# Altium PCB ArduinoUnoShield.PcbDoc
Units mm, origin at the board's own origin, x right, y up, seen from the top; angles counter-clockwise.
Board outline 82.58 x 53.34 mm, 2 copper layers (Top Layer, Bottom Layer); 54 components, 54 nets, 203 pads, 29 vias.
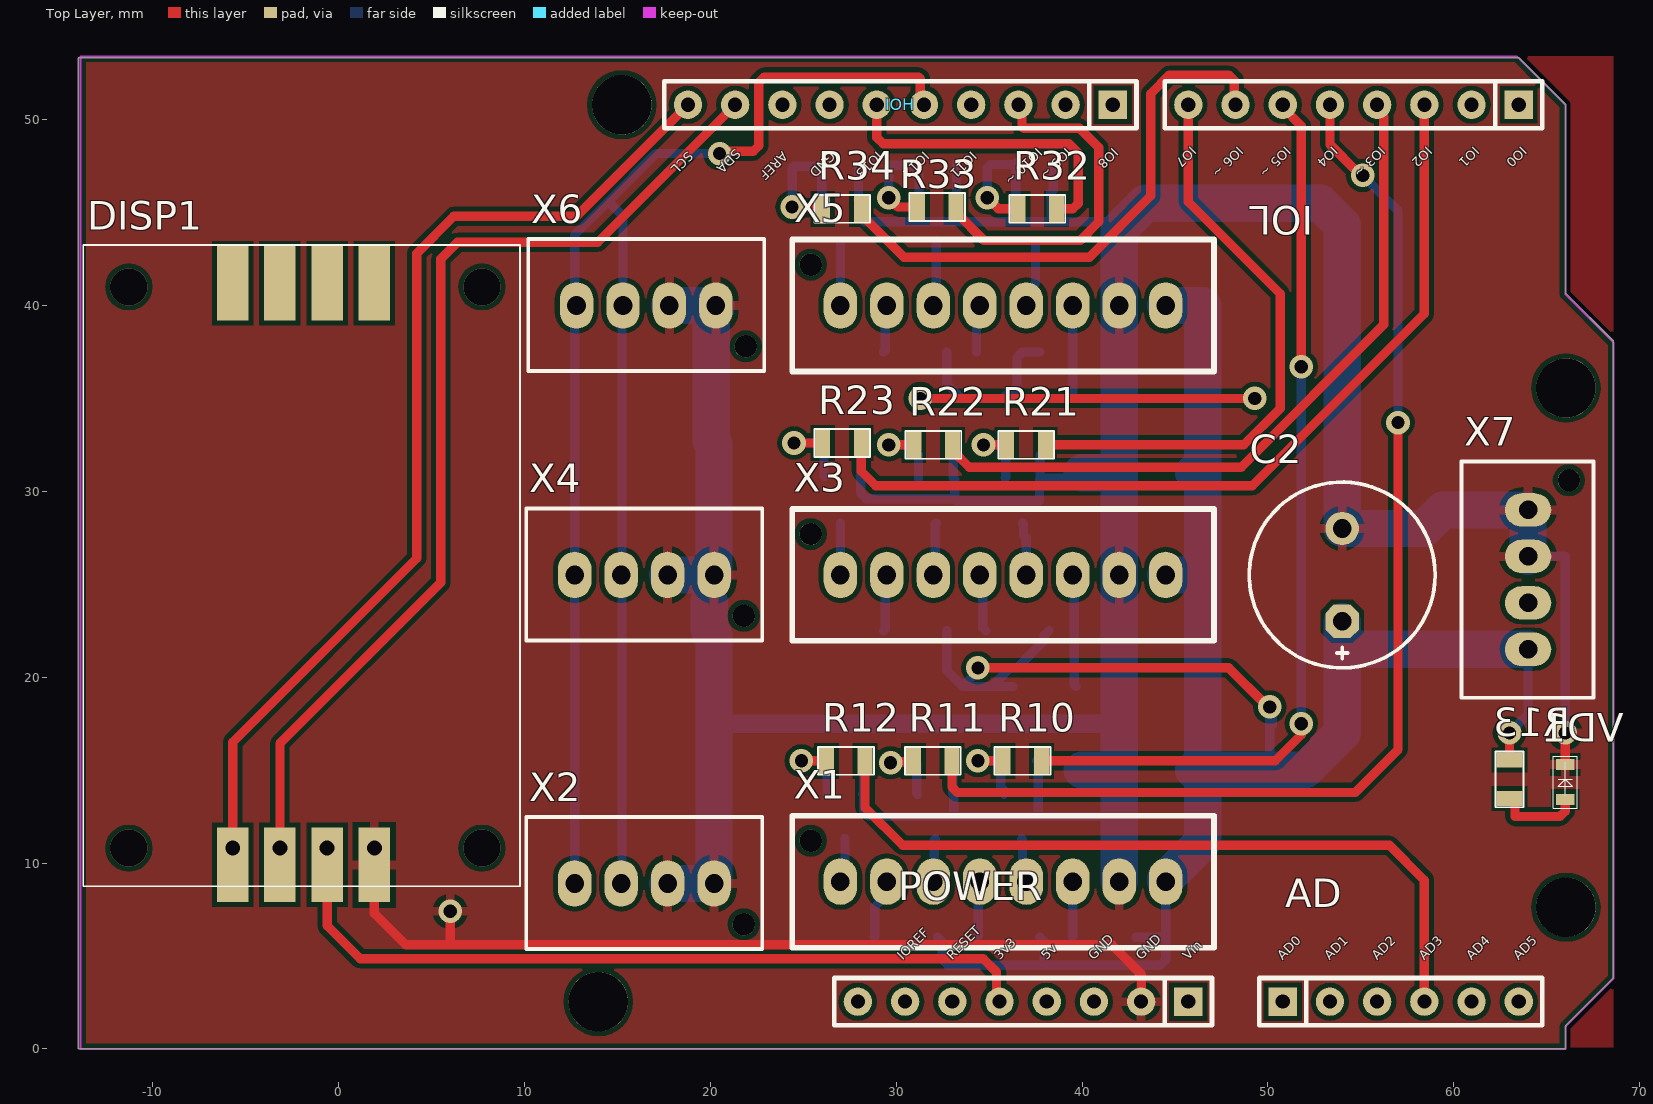
[diagram p0: Top Layer view]
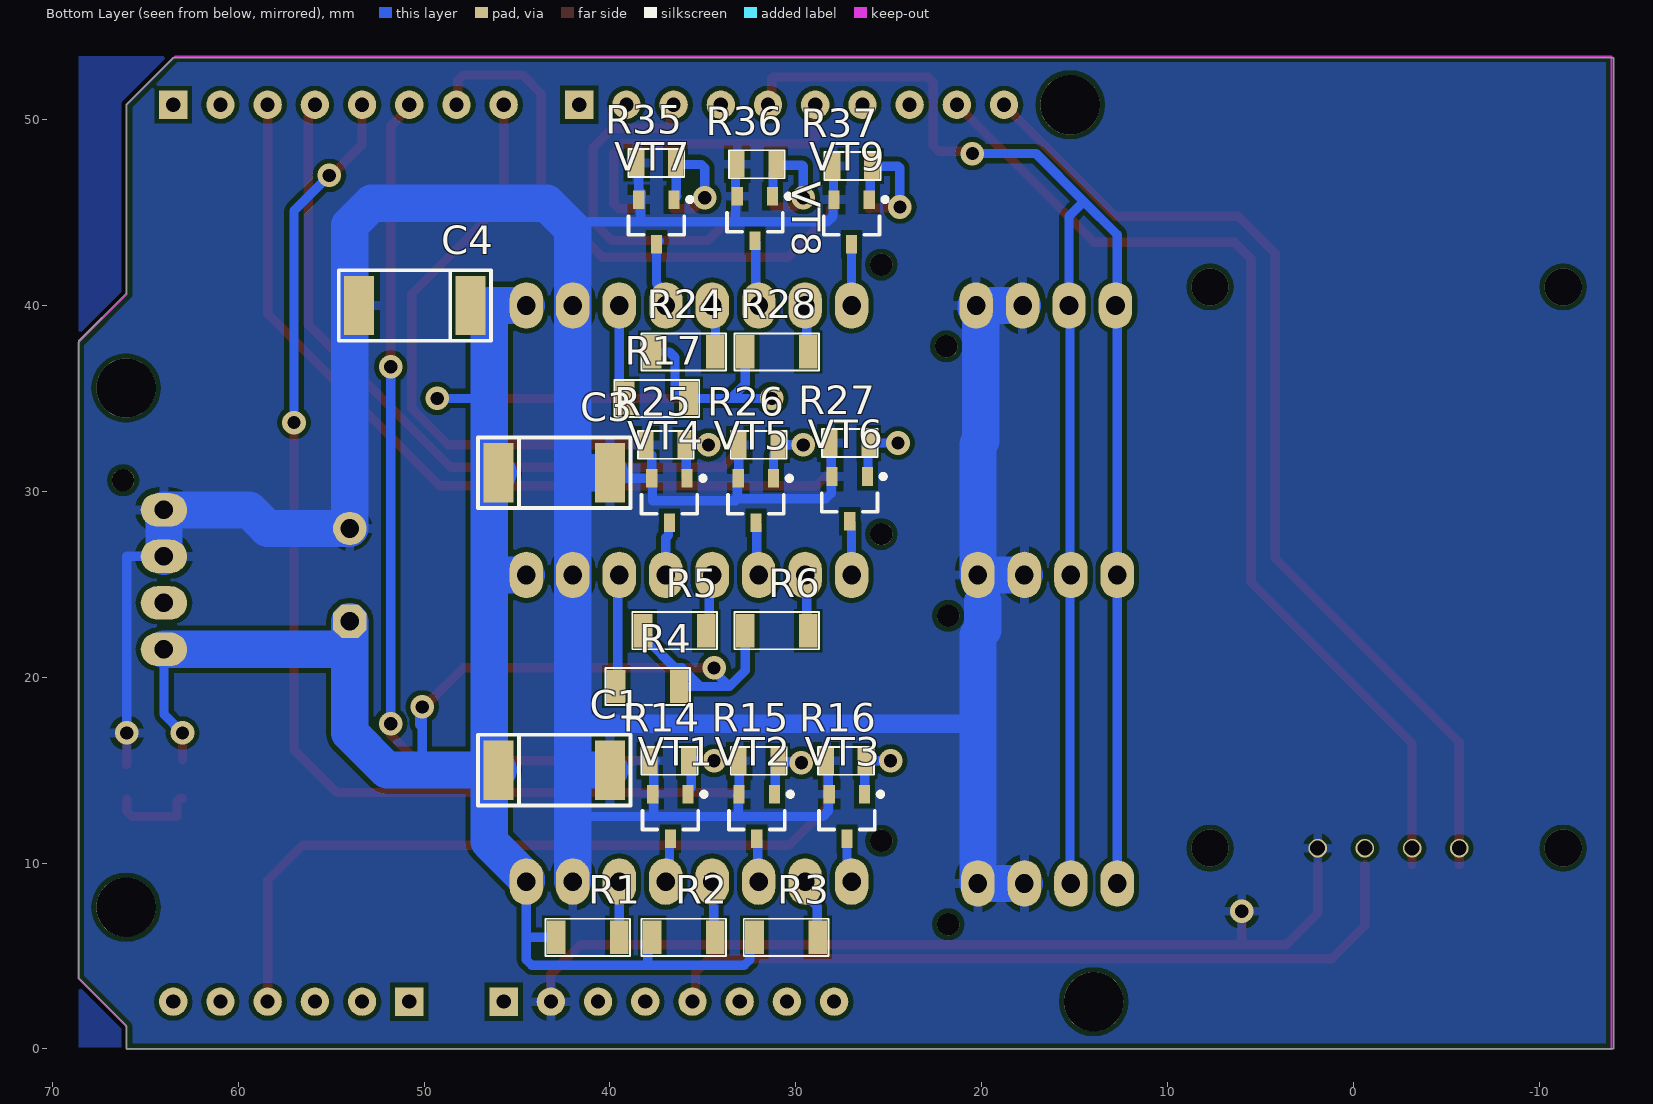
[diagram p1: Bottom Layer view, seen from below]
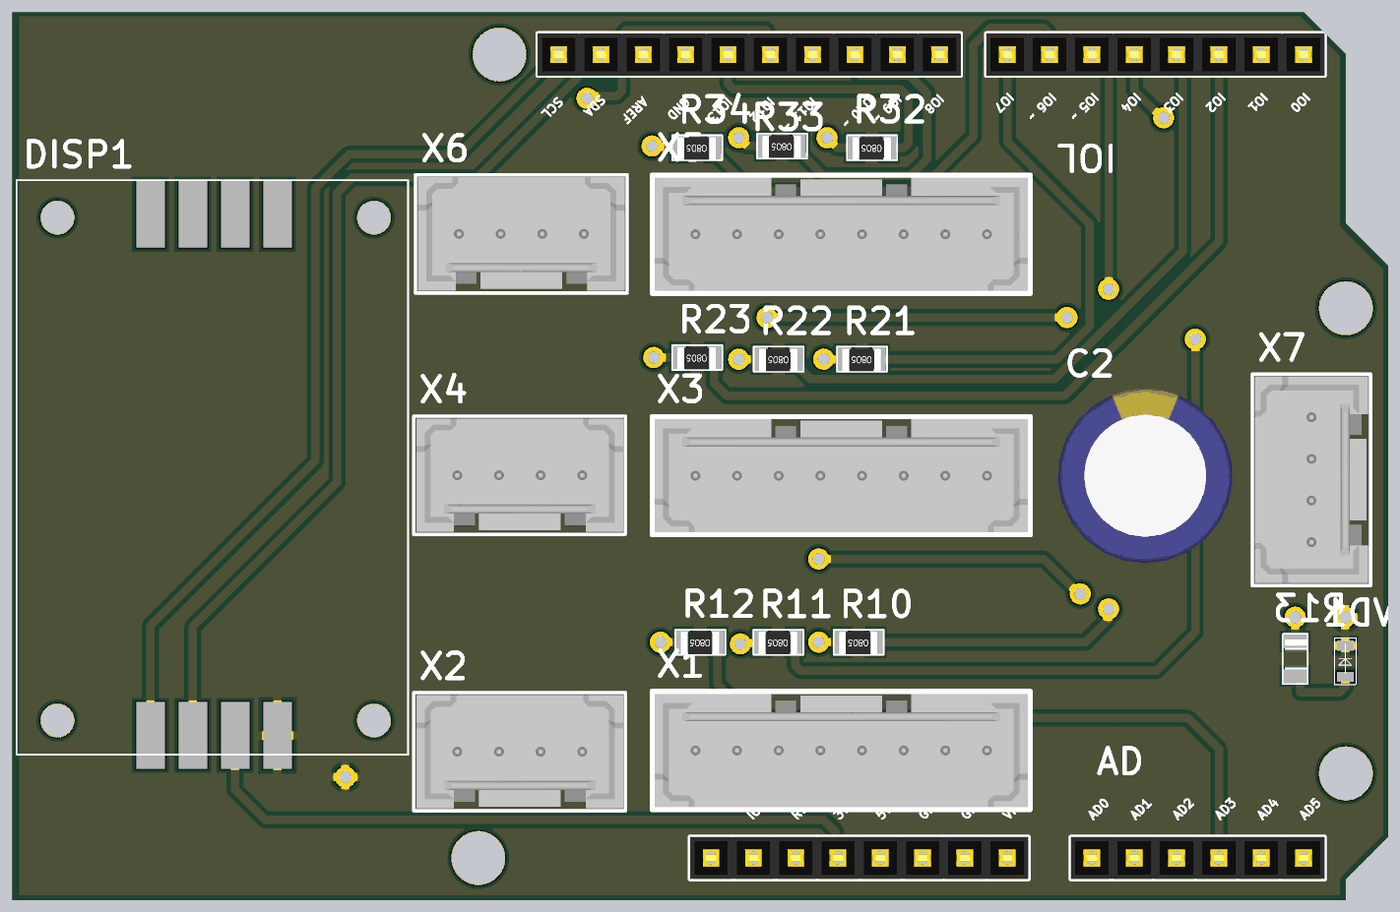
[diagram p2: 3D render of the assembled board from above, using the file's embedded part models]
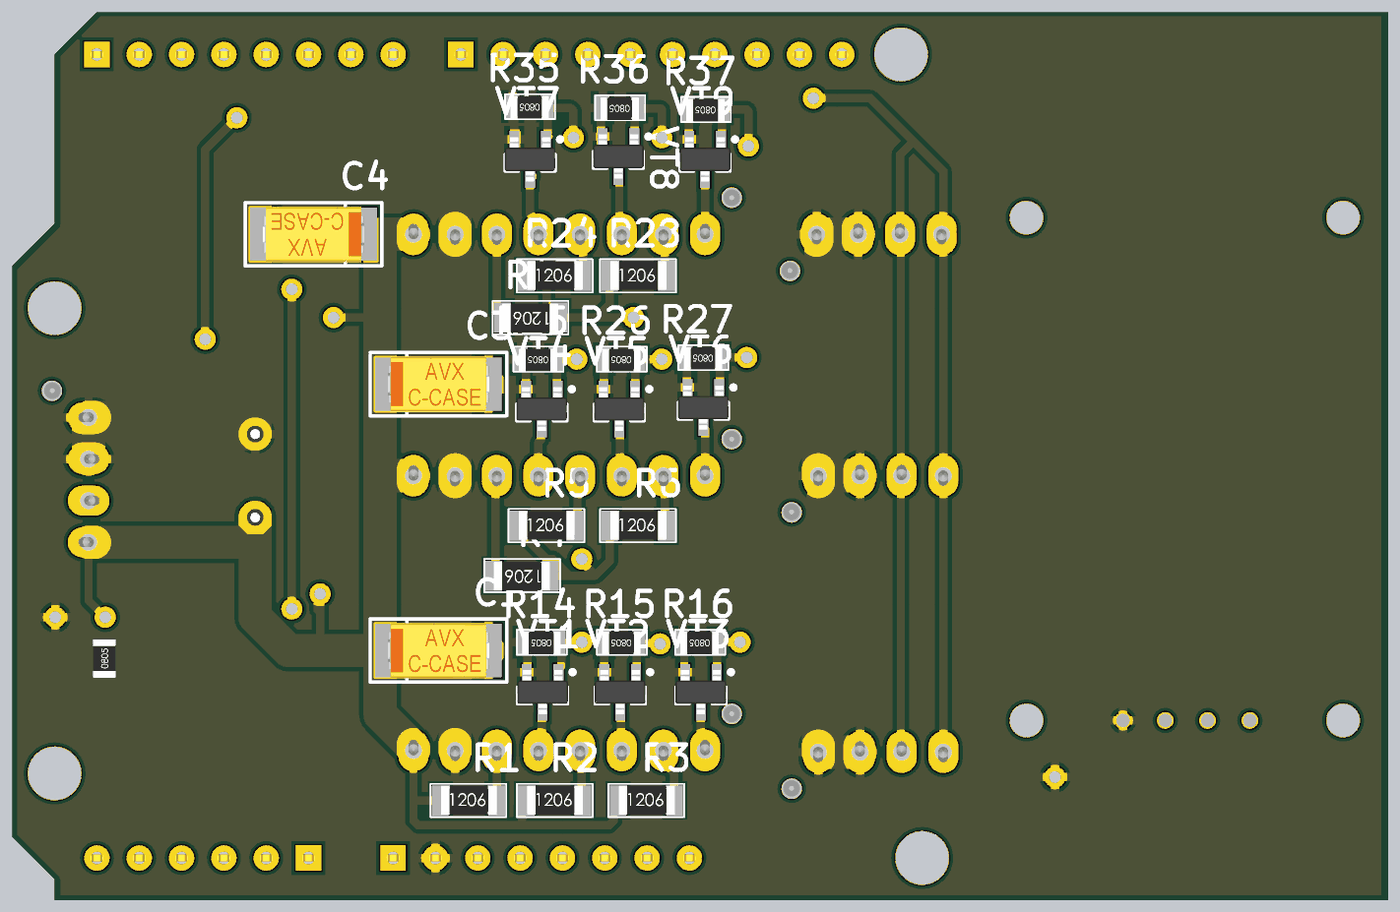
[diagram p3: 3D render of the assembled board from below, using the file's embedded part models]

## Layer stack, top to bottom
Top Solder: solder mask 0.0102, Solder Resist, Dk 3.5
Top Layer: signal copper 0.0356
Dielectric1: dielectric 0.32, FR-4, Dk 4.8
Bottom Layer: signal copper 0.0356
Bottom Solder: solder mask 0.0102, Solder Resist, Dk 3.5

## Board outline
-14,0 -14,53.34 63.5,53.34 66.04,50.8 66.04,40.64 68.58,38.1 68.58,3.81 66.04,1.27 66.04,0

## Design rules (kind name [scope] priority, off if disabled: settings)
Clearance [All] p1: gap=0.254 ignorepadtopadclearanceinfootprint=FALSE except(0: Arc-Hole Track-Hole SMDPad-Hole THPad-Hole Via-Hole Fill-Hole Poly-Hole Region-Hole Text-Hole)
PolygonConnect [All] p1: connectstyle=Relief reliefconductorwidth=0.5 reliefentries=4 polygonreliefangle="90 Angle" airgapwidth=0.3
RoomDefinition ArduinoUnoShield [InComponentClass('ArduinoUnoShield')] p1: confinementstyle=ConfineOut formatcopy=TRUE lockcomponents=FALSE outline 69.723,-0.889 84.709,-0.889 84.709,10.922 69.723,10.922
RoutingVias [All] p1: holewidth=0.711 width=1.27 viastyle="Through Hole" minholewidth=0.711 minwidth=1.27 maxholewidth=0.711 maxwidth=1.27
SilkToSolderMaskClearance SilkscreenOverComponentPads [IsPad] p1: minsilkscreentomaskgap=0.254 clearancetoexposedcopper=TRUE
SolderMaskExpansion [All] p1: expansion=0.102
Width [All] p1: maxlimit=2 minlimit=0.254 preferedwidth=0.5 minimp=50.000000 maximp=50.000000 favimp=50.000000
29 further rules are at their usual default settings.

## Components (designator, comment, footprint, x,y, rotation, side; value= is the part's Value field where it differs from the comment)
AD "AD" "Header 6x1 8.5mm" 50.8,2.54 r0 top locked
C1 "*" TANTAL_C 43,15 r180 bottom
C2 "*" D10C5H12.5 54,25.5 r90 top
C3 "*" TANTAL_C 43,31 r180 bottom
C4 "*" TANTAL_C 50.5,40 r0 bottom
DISP1 "OLED" "DISP: OPEN_SMART_0.96inch_OLED" -1.89,9 r90 top
IOH "IOH" "Header 10x1 8.5mm" 41.656,50.8 r180 top locked
IOL "IOL" "Header 8x1 8.5mm" 63.5,50.8 r180 top locked
POWER "POWER_UNO" "Header 8x1 8.5mm" 45.72,2.54 r180 top locked
R1 "R_1206_0.25v" R_1206 41.175,6 r180 bottom
R2 "R_1206_0.25v" R_1206 36,6 r180 bottom
R3 "R_1206_0.25v" R_1206 30.5,6 r180 bottom
R4 "R_1206_0.25v" R_1206 38,19.5 r0 bottom
R5 "R_1206_0.25v" R_1206 36.5,22.5 r180 bottom
R6 "R_1206_0.25v" R_1206 31,22.5 r180 bottom
R10 "R_0805_0.125v" R_0805 36.8,15.5 r180 top
R11 "R_0805_0.125v" R_0805 31.975,15.5 r180 top
R12 "R_0805_0.125v" R_0805 27.3,15.5 r180 top
R13 "R_0805_0.125v" R_0805 63,14.5 r90 top
R14 "R_0805_0.125v" R_0805 36.8,15.5 r0 bottom
R15 "R_0805_0.125v" R_0805 32,15.5 r0 bottom
R16 "R_0805_0.125v" R_0805 27.3,15.5 r0 bottom
R17 "R_1206_0.25v" R_1206 37.5,35 r0 bottom
R21 "R_0805_0.125v" R_0805 37,32.5 r180 top
R22 "R_0805_0.125v" R_0805 32,32.5 r180 top
R23 "R_0805_0.125v" R_0805 27.1,32.6 r180 top
R24 "R_1206_0.25v" R_1206 36,37.5 r180 bottom
R25 "R_0805_0.125v" R_0805 37,32.5 r0 bottom
R26 "R_0805_0.125v" R_0805 32,32.5 r0 bottom
R27 "R_0805_0.125v" R_0805 27.1,32.6 r0 bottom
R28 "R_1206_0.25v" R_1206 31,37.5 r180 bottom
R32 "R_0805_0.125v" R_0805 37.6,45.2 r180 top
R33 "R_0805_0.125v" R_0805 32.2,45.3 r180 top
R34 "R_0805_0.125v" R_0805 27.1,45.2 r180 top
R35 "R_0805_0.125v" R_0805 37.5,47.673 r0 bottom
R36 "R_0805_0.125v" R_0805 32.1,47.6 r0 bottom
R37 "R_0805_0.125v" R_0805 26.95,47.5 r0 bottom
VD1 "LED" VD_0603 66,14.5 r90 top
VT1 "*" SOT23_123 36.75,12.5 r270 bottom
VT2 "*" SOT23_123 32.1,12.5 r270 bottom
VT3 "*" SOT23_123 27.25,12.5 r270 bottom
VT4 "*" SOT23_123 36.8,29.5 r270 bottom
VT5 "*" SOT23_123 32.15,29.5 r270 bottom
VT6 "*" SOT23_123 27.1,29.6 r270 bottom
VT7 "*" SOT23_123 37.5,44.5 r270 bottom
VT8 "*" SOT23_123 32.2,44.673 r270 bottom
VT9 "*" SOT23_123 27,44.5 r270 bottom
X1 "*" "CON: 0533750810" 49.5,9 r180 top
X2 "*" "CON: 0533750410" 12.7,8.9 r0 top
X3 "*" "CON: 0533750810" 49.5,25.5 r180 top
X4 "*" "CON: 0533750410" 12.7,25.5 r0 top
X5 "*" "CON: 0533750810" 49.5,40 r180 top
X6 "*" "CON: 0533750410" 12.8,40 r0 top
X7 "*" "CON: 0533750410" 64,21.5 r90 top

## Footprints (in the part's own frame and the unit in brackets; to place one, negate y for a bottom-side part, rotate by r counter-clockwise, add the part's x,y. Pads: shape width x height; smd on the part's side, far side on the other; paste and mask are expansions set on the pad)
"CON: 0533750410" [mm] "MOLEX Mini-Lock"
  oval 1.8x2.5 hole 1: 1(0,0) 2(2.5,0) 3(5,0) 4(7.5,0)
  round 0.5 on Mech1: ""(-1.9,-2.8)
  round 1.2 hole 1.2: ""(9.1,-2.2)
  silkscreen extent -2.6,-3.52 10.1,3.57, body extent -2.44,-3.37 9.96,3.43, height 11.55
"CON: 0533750810" [mm] "MOLEX Mini-Lock"
  oval 1.8x2.5 hole 1: 1(5,0) 2(7.5,0) 3(10,0) 4(12.5,0) 5(15,0) 6(17.5,0) 7(20,0) 8(22.5,0)
  round 0.5 on Mech1: ""(3.2,-2.8)
  round 1.2 hole 1.2: ""(24.1,-2.2)
  silkscreen extent 2.4,-3.55 25.1,3.55, body extent 2.55,-3.4 24.95,3.4, height 11.55
D10C5H12.5 [mm] "Polar capacitor, diameter 10 mm, leads clearance 5 mm, height 12.5 mm"
  oct 1.8x1.8 hole 1: 1(-2.5,0)
  round 1.8 hole 1: 2(2.5,0)
  silkscreen extent -5,-5 5,5, body extent -5.25,-5.25 5.25,5.25, height 14
"DISP: OPEN_SMART_0.96inch_OLED" [mm]
  rect 4x1.7 smd: 0(32.2,-3.81) 0(32.2,-1.27) 0(32.2,1.27) 0(32.2,3.81) 1(0.9,3.81) 2(0.9,1.27) 3(0.9,-1.27) 4(0.9,-3.81)
  silkscreen extent -0.25,-11.65 34.25,11.85
"Header 6x1 8.5mm" [mil] "Stackable 6 pin header"
  rect 60x60 hole 30: 1(0,0)
  round 60 hole 30: 2(100,0) 3(200,0) 4(300,0) 5(400,0) 6(500,0)
  silkscreen extent -50,-50 550,50, body extent -50,-50 550,50, height 335
"Header 8x1 8.5mm" [mil] "Stackable 8 pin header"
  rect 60x60 hole 30: 1(0,0)
  round 60 hole 30: 2(100,0) 3(200,0) 4(300,0) 5(400,0) 6(500,0) 7(600,0) 8(700,0)
  silkscreen extent -50,-50 750,50, body extent -50,-50 750,50, height 335
"Header 10x1 8.5mm" [mil] "Stackable 10 pin header"
  rect 60x60 hole 30: 1(0,0)
  round 60 hole 30: 2(100,0) 3(200,0) 4(300,0) 5(400,0) 6(500,0) 7(600,0) 8(700,0) 9(800,0) 10(900,0)
  silkscreen extent -50,-50 950,50, body extent -50,-50 950,50, height 335
R_0805 [mm]
  rect 0.8x1.4 smd: 1(-1.025,0) 2(1.05,0)
  silkscreen extent -1.5,-0.75 1.5,0.75, body extent -1.12,-0.62 1.18,0.73, height 0.76
R_1206 [mm]
  rect 1x1.8 smd: 1(-1.725,0) 2(1.675,0)
  silkscreen extent -2.3,-1 2.25,1, body extent -1.67,-0.84 1.68,0.89, height 0.85
SOT23_123 [mm] "SOT23, 3-Leads, Body 3,0x2,6mm (max), Pitch 0,95mm, IPC Medium Density"
  rect 1x0.6 smd: 1(-1.2,0.95) 2(1.2,0) 3(-1.2,-0.95)
  round 0.5 on Mech1: ""(-0.9,1.1)
  silkscreen extent -1.32,-1.5 0.7,1.92, body extent -1.32,-1.52 1.32,1.52, height 1.12
TANTAL_C [mm]
  rect 1.6x3.2 smd: 1(-3,0) 2(3,0)
  round 0.5 on Mech1: ""(-2.5,1.1)
  silkscreen extent -4.1,-1.9 4.1,1.9, body extent -3.05,-1.67 3.05,1.68, height 2.7
VD_0603 [mm]
  rect 0.6x1 smd: 1(-1.075,0) 2(0.8,0)
  silkscreen extent -1.55,-0.65 1.25,0.65

## Part data
AD: Supplier Part Number 1=2699089, Supplier 1=Arrow, Supplier 2=Digi-Key, Supplier 3=Arrow, Supplier 4=Arrow, Supplier Part Number 2=SAM1198-06-ND, Supplier Part Number 3=2699088, Supplier Part Number 4=2699075
C1 C3 C4: library part TantalCap
C2: library part AlumCap
DISP1: library part OLED_SSD13
IOH: Supplier Part Number 1=2698803S4475693N1004, Supplier 1=Arrow, Supplier 2=Digi-Key, Supplier 3=Arrow, Supplier Part Number 2=SAM1198-10-ND, Supplier Part Number 3=2698789
IOL POWER: Supplier Part Number 1=SAM1198-08-ND, Supplier 1=Digi-Key, Supplier 2=Arrow, Supplier 3=Arrow, Supplier 4=Arrow, Supplier Part Number 2=2698939, Supplier Part Number 3=2698940, Supplier Part Number 4=2698925
VT1 VT2 VT3 VT4 VT5 VT6 VT7 VT8 VT9: library part N-chanel, "Mosfet"
X1 X3 X5: library part 8-Connector
X2 X4 X6 X7: library part 4-Connector

## Free pads (board coordinates)
  round 3.2 hole 3.2: 0(13.97,2.54) 0(15.24,50.8) 0(66.04,7.62) 0(66.04,35.56)

## Via types
v1: diameter 1.27, hole 0.711, Top Layer to Bottom Layer, 21 vias
v2: diameter 2, hole 2, Top Layer to Bottom Layer, 4 vias
v3: diameter 1, hole 0.8, Top Layer to Bottom Layer, 4 vias

## Nets (pads, with @x,y where several pads share a name; then routed paths per layer and width w, separated by ;. In a path a pad name is that pad's centre, name@x,y a point inside that pad or via, vN(x,y) a via of type N, cw(c..) or ccw(c..) an arc to the next point about the centre after c; other vN are vias at no path point)
3V3: DISP1.3 POWER.5 | length 42
  Top Layer w0.5: DISP1.3 -0.62,6.62 1.158,4.842 34.689,4.842 35.4,4.131 35.4,2.7 POWER.5
  other v3: -0.62,10.8
+12: C1.1 C2.1 C3.1 C4.1 R1.1 R2.1 R3.1 R4.1 R5.1 R6.1 R13.2 R17.1 R24.1 R28.1 X1.1 X3.1 X5.1 X7.1 | length 153.9
  Top Layer w0.5: v1(31.3,35) v1(49.3,35) ; v1(34.4,20.5) 47.9,20.5 49.9,18.5 50,18.5 v1(50.1,18.4) ; R13.2 v1(63,17)
  Bottom Layer w0.5: v1(31.3,35) 33.5,35 ; R3.1 32.475,5.75 32.475,4.793 32.768,4.5 38,4.5 ; R6.1 32.725,20.361 33.586,19.5 ; R28.1 32.725,35.775 33.5,35 ; v1(34.4,20.5) 34.4,20.314 33.586,19.5 ; R4.1 35.137,19.5 ; R2.1 37.975,5.75 37.975,4.525 38,4.5 ; R24.1 36.793,37.5 36.5,37.207 36.5,35.293 36.025,35.293 35.775,35.043 R17.1 33.5,35 ; R5.1 37.975,22.25 37.975,21.975 36.5,20.5 36.137,20.5 35.137,19.5 ; R1.1 44.5,6 ; X1.1 44.5,6 ; 46.5,35.1 46.6,35 v1(49.3,35) ; 50.2,15 50.1,15.1 v1(50.1,18.4) 50.247,18.253 50.247,17.442 ; v1(63,17) 64,18 X7.1 ; 33.586,19.5 35.137,19.5 ; 38,4.5 44.207,4.5 44.5,4.793 44.5,6
  Bottom Layer w2: X1.1 44.5,9.15 46.5,11.15 C1.1@46.5,15 ; X3.1 46.5,25.5 ; X5.1 46.5,40 46.5,35.1 C3.1@46.5,31 ; C1.1 C1.1@46.5,15 ; C3.1 C3.1@46.5,31 ; C2.1 54,21 ; X7.1 54.5,21.5 54,21 ; C1.1@46.5,15 50.2,15 52,15 54,17 54,21 ; C1.1@46.5,15 46.5,25.5 ; 46.5,25.5 C3.1@46.5,31
AD0: AD.1
AD1: AD.2
AD2: AD.3
AD4: AD.5
AD5: AD.6
DIR1: VT2.2 X1.6 | length 2.3
  Bottom Layer w0.5: X1.6 32.05,9.05 32.05,11.25 VT2.2
DIR2: VT5.2 X3.6 | length 2.9
  Bottom Layer w0.5: X3.6 32.1,25.6 32.1,28.25 VT5.2
DIR3: VT8.2 X5.6 | length 3.6
  Bottom Layer w0.5: X5.6 32.15,40.15 32.15,43.423 VT8.2
DIR_IN_1: IOL.5 R11.1 | length 62.8
  Top Layer w0.5: R11.1 33,14.093 33.293,13.8 54.7,13.8 57,16.1 v1(57,33.7) ; IOL.5 53.34,48.66 54.8,47.2 54.9,47.2 v1(55.1,47)
  Bottom Layer w0.5: v1(55.1,47) 57,45.1 v1(57,33.7)
DIR_IN_2: IOL.4 R22.1 | length 39
  Top Layer w0.5: R22.1 33.025,32.2 33.929,31.296 48.562,31.296 56.239,38.973 56.239,50.164 55.88,50.523 IOL.4
DIR_IN_3: IOH.3 R33.1 | length 18.9
  Top Layer w0.5: R33.1 33.225,45 34.725,43.5 39.9,43.5 40.9,44.5 40.9,48.5 39.866,49.534 36.869,49.534 36.772,49.631 36.772,50.604 IOH.3
EN1: VT3.2 X1.8 | length 2.2
  Bottom Layer w0.5: X1.8 27.249,9.249 VT3.2@27.249,10.899 ; VT3.2@27.25,11.1 VT3.2
EN2: VT6.2 X3.8 | length 2.8
  Bottom Layer w0.5: X3.8 VT6.2@27,28.3
EN3: VT9.2 X5.8 | length 3.3
  Bottom Layer w0.5: X5.8 VT9.2
EN_IN_1: AD.4 R12.1 | length 40.8
  Top Layer w0.5: R12.1 28.325,12.975 30.35,10.95 56.55,10.95 58.42,9.08 AD.4
EN_IN_2: IOL.3 R23.1 | length 47.2
  Top Layer w0.5: R23.1 28.125,31.075 28.904,30.296 49.162,30.296 58.42,39.554 IOL.3
EN_IN_3: IOL.7 R34.1 | length 30.1
  Top Layer w0.5: R34.1 28.125,44.9 30.425,42.6 40.4,42.6 43.7,45.9 43.7,51.4 44.7,52.4 47.9,52.4 48.193,52.107 48.193,50.867 IOL.7
GND: C1.2 C2.2 C3.2 C4.2 DISP1.4 POWER.2 R14.2 R15.2 R16.2 R25.2 R26.2 R27.2 R35.2 R36.2 R37.2 VD1.2 VT1.3 VT2.3 VT3.3 VT4.3 VT5.3 VT6.3 VT7.3 VT8.3 VT9.3 X1.2 X2.3 X2.4 X3.2 X4.3 X4.4 X5.2 X6.3 X6.4 X7.3 X7.4 | length 269.7
  Top Layer w0.5: DISP1.4 1.92,7.293 3.617,5.596 6,5.596 ; v1(6,7.4) 6,5.596 ; POWER.2 43.2,2.56 43.2,4 41.604,5.596 6,5.596 ; VD1.2 v1(66,17)
  Bottom Layer w0.5: R37.2 27.975,47.475 27.975,45.725 VT9.3 28,45.65 28,44.793 28.293,44.5 33.25,44.5 ; R27.2 28.1,32.55 28.1,30.85 VT6.3 28.1,30.75 28.1,29.893 28.393,29.6 33.15,29.6 ; R16.2 28.25,15.4 28.25,13.75 VT3.3 28.25,13.65 28.25,12.793 28.543,12.5 ; 28.743,12.5 33.121,12.5 ; R15.2 VT2.3 33.1,13.65 33.1,12.521 33.121,12.5 ; R26.2 33.075,32.475 33.075,30.725 VT5.3 33.15,30.65 33.15,29.6 ; R36.2@33.25,47.673 33.25,44.5 ; R14.2@37.55,15.5 37.65,15.4 37.65,13.75 VT1.3 37.65,13.65 37.65,12.65 37.5,12.5 ; R25.2 38.05,32.2 37.8,31.95 37.75,31.95 VT4.3 ; R35.2 38.45,47.573 38.45,46.223 38.3,46.073 38.3,45.873 38.35,45.823 38.35,44.65 38.5,44.5 ; C3.2 39.7,30.7 VT4.3 ; 42,12.5 37.5,12.5 ; 42,44.1 41.6,44.5 38.5,44.5 ; X7.3 66,26.5 v1(66,17) ; 33.121,12.5 37.5,12.5 ; 33.15,29.6 33.25,29.5 37.707,29.5 37.707,30.657 VT4.3 ; 33.25,44.5 38.5,44.5
  Bottom Layer w1: 20.2,17.5 42,17.5
  Bottom Layer w2: X4.3 X4.4 20.2,32.546 20.046,32.7 20.046,39.596 20.3,39.85 X6.4 X6.3 ; X2.3@17.8,9 X2.3 X2.4 20.2,17.5 20.2,22.278 19.946,22.532 19.946,24.068 ; C1.2 42,15 ; C3.2 42,31 ; X1.2 42,12.5 42,15 ; X7.3 X7.4 59.425,29 58.425,28 C2.2 54,44.328 52.828,45.5 43.4,45.5 42,44.1 X5.2 42,31 ; 42,15 42,17.5 X3.2 42,31
  other v3: 1.92,10.8
IO0: IOL.1
IO1: IOL.2
IO8: IOH.1 | length 0.5
  Top Layer w0.5: IOH.1@41.307,50.451 IOH.1
IO9: IOH.2
IO11: IOH.4
IO12: IOH.5 X2.1 X2.2 X4.1 X4.2 X6.1 X6.2 | length 97.6
  Top Layer w0.5: v1(20.5,48.174) 20.626,48.3 22.307,48.3 22.602,48.595 22.602,52.002 22.9,52.3 31.203,52.3 31.3,52.203 31.3,50.996 IOH.5
  Bottom Layer w0.5: X2.1 X4.1 12.7,43.8 14.5,45.6 ; X2.2 15.25,8.95 15.25,39.95 X6.2 15.3,44.8 14.5,45.6 ; v1(20.5,48.174) 17.074,48.174 14.5,45.6
NetR1_2: R1.2 X1.3 | length 3
  Bottom Layer w0.5: R1.2 X1.3
NetR2_2: R2.2 X1.5 | length 3.1
  Bottom Layer w0.5: R2.2 34.412,6.088 34.412,8.912 X1.5
NetR3_2: R3.2 X1.7 | length 3.3
  Bottom Layer w0.5: R3.2 28.852,6.027 28.852,7.65 29.5,8.298 X1.7
NetR4_2: R4.2 X3.3 | length 6.1
  Bottom Layer w0.5: X3.3 39.588,25.412 39.588,19.587 R4.2
NetR5_2: R5.2 X3.5 | length 3.1
  Bottom Layer w0.5: X3.5 34.662,25.338 34.662,22.663 R5.2
NetR6_2: R6.2 X3.7 | length 3.1
  Bottom Layer w0.5: R6.2 29.412,22.588 29.412,25.412 X3.7
NetR10_2: R10.2 R14.1 VT1.1 | length 4.1
  Top Layer w0.5: v1(34.4,15.5) R10.2@35.45,15.5
  Bottom Layer w0.5: v1(34.4,15.5) 35.475,15.5 35.625,15.35 35.625,14.075 35.8,13.9 VT1.1
NetR11_2: R11.2 R15.1 VT2.1 | length 4.7
  Top Layer w0.5: v1(29.7,15.4) 29.75,15.45 30.875,15.45 R11.2
  Bottom Layer w0.5: v1@29.5,15.5 29.6,15.4 v1(29.7,15.4) 29.75,15.45 30.925,15.45 R15.1 31.1,15.375 31.1,13.75 VT2.1
NetR12_2: R12.2 R16.1 VT3.1 | length 4.5
  Top Layer w0.5: v1(24.9,15.5) R12.2
  Bottom Layer w0.5: v1(24.9,15.5) R16.1 26.288,15.487 26.288,13.713 VT3.1
NetR13_1: R13.1 VD1.1 | length 4.6
  Top Layer w0.5: R13.1 63.143,13.475 63.293,13.325 63.293,12.5 65.707,12.5 66,12.793 VD1.1
NetR17_2: R17.2 X5.3 | length 5.4
  Bottom Layer w0.5: R17.2@38.9,35 39.207,35 39.5,35.293 X5.3
NetR21_2: R21.2 R25.1 VT4.1 | length 4.4
  Top Layer w0.5: v1(34.7,32.5) R21.2
  Bottom Layer w0.5: v1(34.7,32.5) R25.1 35.9,32.425 35.9,30.75 VT4.1
NetR22_2: R22.2 R26.1 VT5.1 | length 4.6
  Top Layer w0.5: v1(29.6,32.5) R22.2
  Bottom Layer w0.5: v1(29.6,32.5) R26.1 30.975,32.2 31.2,31.975 VT5.1
NetR23_2: R23.2 R27.1 VT6.1 | length 5
  Top Layer w0.5: v1(24.5,32.6) R23.2
  Bottom Layer w0.5: v1(24.5,32.6) R27.1 26.112,32.562 26.112,30.838 VT6.1
NetR24_2: R24.2 X5.5 | length 2.6
  Bottom Layer w0.5: R24.2 34.325,39.825 X5.5
NetR28_2: R28.2 X5.7 | length 2.6
  Bottom Layer w0.5: R28.2 29.412,37.588 29.412,39.912 X5.7
NetR32_2: R32.2 R35.1 VT7.1 | length 7
  Top Layer w0.5: v1(34.9,45.8) 35.5,45.2 R32.2
  Bottom Layer w0.5: v1(34.9,45.8) 34.9,47.4 35.087,47.587 36.388,47.587 R35.1@36.438,47.636 ; VT7.1@36.4,45.873 36.438,45.911 R35.1@36.438,47.636 ; R35.1 R35.1@36.438,47.636
NetR33_2: R33.2 R36.1 VT8.1 | length 6.7
  Top Layer w0.5: v1(29.6,45.8) 30.1,45.3 R33.2
  Bottom Layer w0.5: v1(29.6,45.8) 29.6,47.5 29.65,47.55 30.925,47.55 30.975,47.5 30.975,47.373 31.225,47.123 31.225,45.898 VT8.1 ; R36.1@30.975,47.6 R36.1@30.975,47.673
NetR34_2: R34.2 R37.1 VT9.1 | length 7.2
  Top Layer w0.5: v1(24.4,45.3) 24.45,45.25 26,45.25 R34.2
  Bottom Layer w0.5: v1(24.4,45.3) 24.4,47.4 24.5,47.5 R37.1 26,47.425 26,45.75 VT9.1
PWM1: VT1.2 X1.4 | length 2.4
  Bottom Layer w0.5: VT1.2 36.8,11.25 36.8,9.2 X1.4
PWM2: VT4.2 X3.4 | length 2.9
  Bottom Layer w0.5: VT4.2 36.85,28.25 36.85,27.65 37,27.5 X3.4
PWM3: VT7.2 X5.4 | length 3.7
  Bottom Layer w0.5: X5.4 37,40.702 37.5,41.202 37.5,43.323 VT7.2@37.35,43.473
PWM_IN_1: IOL.6 R10.1 | length 48.9
  Top Layer w0.5: R10.1 50.4,15.5 51.8,16.9 v1(51.8,17.5) ; IOL.6 50.8,50.662 51.8,49.662 v1(51.8,36.7)
  Bottom Layer w0.5: v1(51.8,17.5) v1(51.8,36.7)
PWM_IN_2: IOL.8 R21.1 | length 31.8
  Top Layer w0.5: R21.1 48.7,32.5 50.661,34.461 50.661,40.639 45.72,45.58 IOL.8
PWM_IN_3: IOH.6 R32.1 | length 17
  Top Layer w0.5: IOH.6 28.956,49.044 29.3,48.7 39.3,48.7 39.8,48.2 39.8,45.493 39.507,45.2 R32.1
SCL: DISP1.1 IOH.10 | length 54.9
  Top Layer w0.5: DISP1.1 v3(-5.7,10.8) -5.7,16.5 4.2,26.4 4.2,42.8 6.2,44.8 12.796,44.8 IOH.10
SDA: DISP1.2 IOH.9 | length 55.5
  Top Layer w0.5: DISP1.2 v3(-3.16,10.8) -3.16,16.44 5.5,25.1 5.5,42.5 6.4,43.4 13.936,43.4 IOH.9
VIN: POWER.1
pads on no net: C1. C3. C4. DISP1.0 IOH.7 IOH.8 POWER.3 POWER.4 POWER.6 POWER.7 POWER.8 VT1. VT2. VT3. VT4. VT5. VT6. VT7. VT8. VT9. X1. X2. X3. X4. X5. X6. X7. X7.2
copper on no net:
  other v2: -11.29,10.8 7.71,10.8 -11.29,41 7.71,41

## Polygon pours and split planes (outlines as drawn)
GND on Bottom Layer "Bottom Layer-GND" (solid, pour order 4): -14,53.34 -13.94,53.4 68.58,53.4 68.58,0.1 -13.9,0.1
no net on Bottom Layer "Bottom Layer-No Net" (solid, pour order 0): 70.2,48.4
GND on Top Layer "Bottom Layer-GND" (solid, pour order 2): -14,53.34 -13.94,53.4 68.58,53.4 68.58,0.1 -13.9,0.1

## Keep-outs
Keep-Out Layer:
  lines w0.1: -13.9,0 -13.9,53.4 63.4,53.4 66,50.8 66,40.6 68.6,38 68.6,3.8 66,1.2 66,0 -13.9,0

## Silkscreen, mask and mechanical layers (free items; w line width, h text height)
Top Overlay:
  text "IO7" at 45.847,48.588 h0.51 r225
  text "IO6 ~" at 48.387,48.588 h0.51 r225
  text "IO5 ~" at 50.927,48.588 h0.51 r225
  text "IO4" at 53.467,48.588 h0.51 r225
  text "IO3 ~" at 56.007,48.588 h0.51 r225
  text "IO2" at 58.547,48.588 h0.51 r225
  text "IO1" at 61.087,48.588 h0.51 r225
  text "IO0" at 63.627,48.588 h0.51 r225
  text "IO10 ~" at 37.576,48.514 h0.51 r225
  text "IO9 ~" at 39.116,48.514 h0.51 r225
  text "IO8" at 41.656,48.514 h0.51 r225
  text "SDA" at 21.336,48.461 h0.51 r225
  text "SCL" at 18.796,48.334 h0.51 r225
  text "AREF" at 23.876,48.334 h0.51 r225
  text "GND" at 26.416,48.334 h0.51 r225
  text "IO13" at 28.956,48.334 h0.51 r225
  text "IO12" at 31.496,48.334 h0.51 r225
  text "IO11 ~" at 34.036,48.334 h0.51 r225
  text "IOREF" at 30.353,4.752 h0.51 r45
  text "RESET" at 33.02,4.752 h0.51 r45
  text "3v3" at 35.56,4.752 h0.51 r45
  text "5v" at 38.1,4.752 h0.51 r45
  text "GND" at 40.64,4.752 h0.51 r45
  text "GND" at 43.18,4.752 h0.51 r45
  text "Vin" at 45.72,4.752 h0.51 r45
  text "AD0" at 50.8,4.752 h0.51 r45
  text "AD1" at 53.34,4.752 h0.51 r45
  text "AD2" at 55.88,4.752 h0.51 r45
  text "AD3" at 58.42,4.752 h0.51 r45
  text "AD4" at 60.96,4.752 h0.51 r45
  text "AD5" at 63.5,4.752 h0.51 r45
  text "RESET" at 34,-21 h0.51 r45
  text "3v3" at 38,-25.5 h0.51 r45
  text "5v" at 37.973,-63.881 h0.51 r45
  text "GND" at 40.513,-63.881 h0.51 r45
  text "GND" at 43.053,-63.881 h0.51 r45
  text "Vin" at 45.593,-63.881 h0.51 r45
Mechanical 1:
  circle w0.127: c15.24,50.8 r1.6
  circle w0.127: c66.04,7.62 r1.6
  circle w0.127: c13.97,2.54 r1.6
  circle w0.127: c66.04,35.56 r1.6
  lines w0.127: -13.9,0 -13.9,53.34 63.5,53.34 66.04,50.8 66.04,40.64 68.58,38.1 68.58,3.81 66.04,1.27 66.04,0 -13.9,0